# EAGLE board module_pcb_v78 (EAGLE 9.7.0)
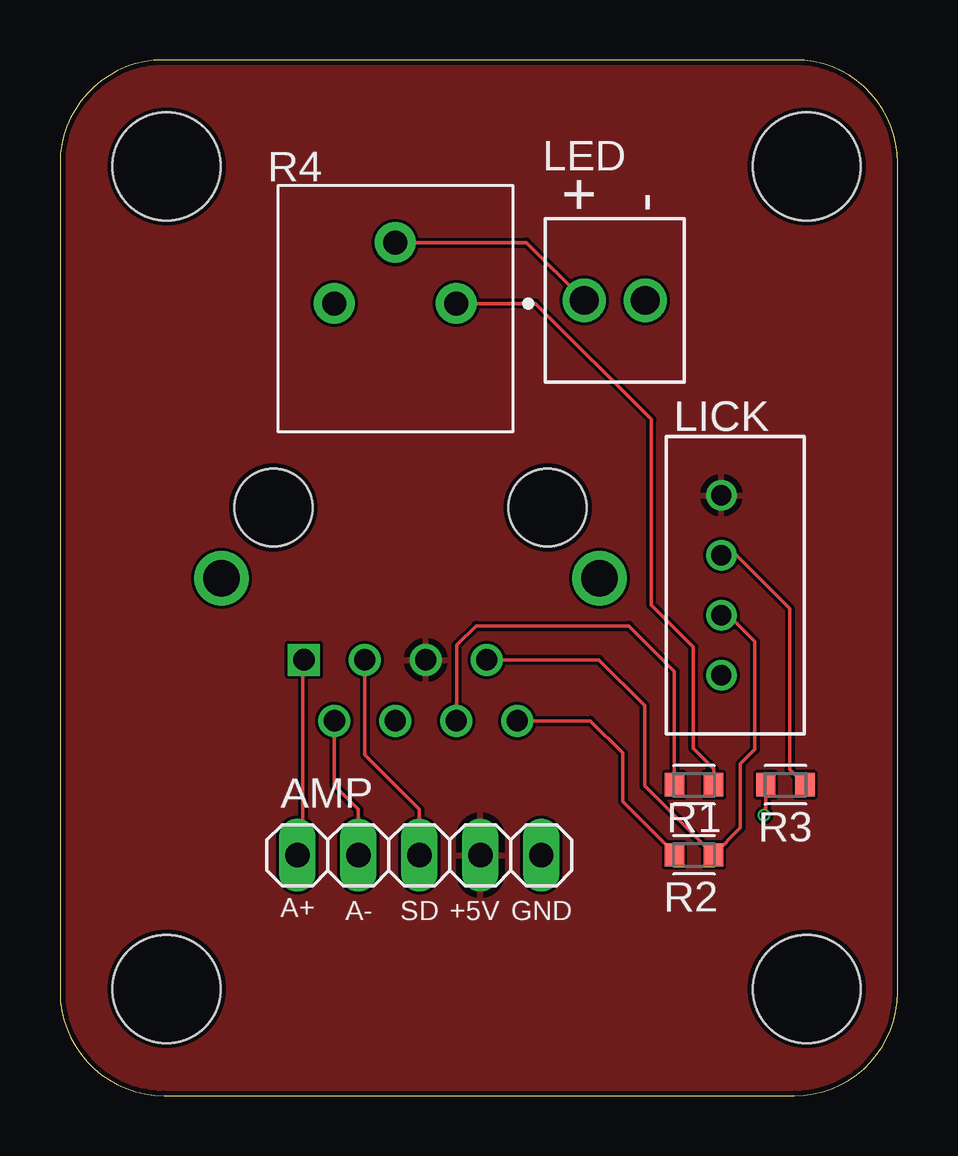
[diagram p0: board, top side]
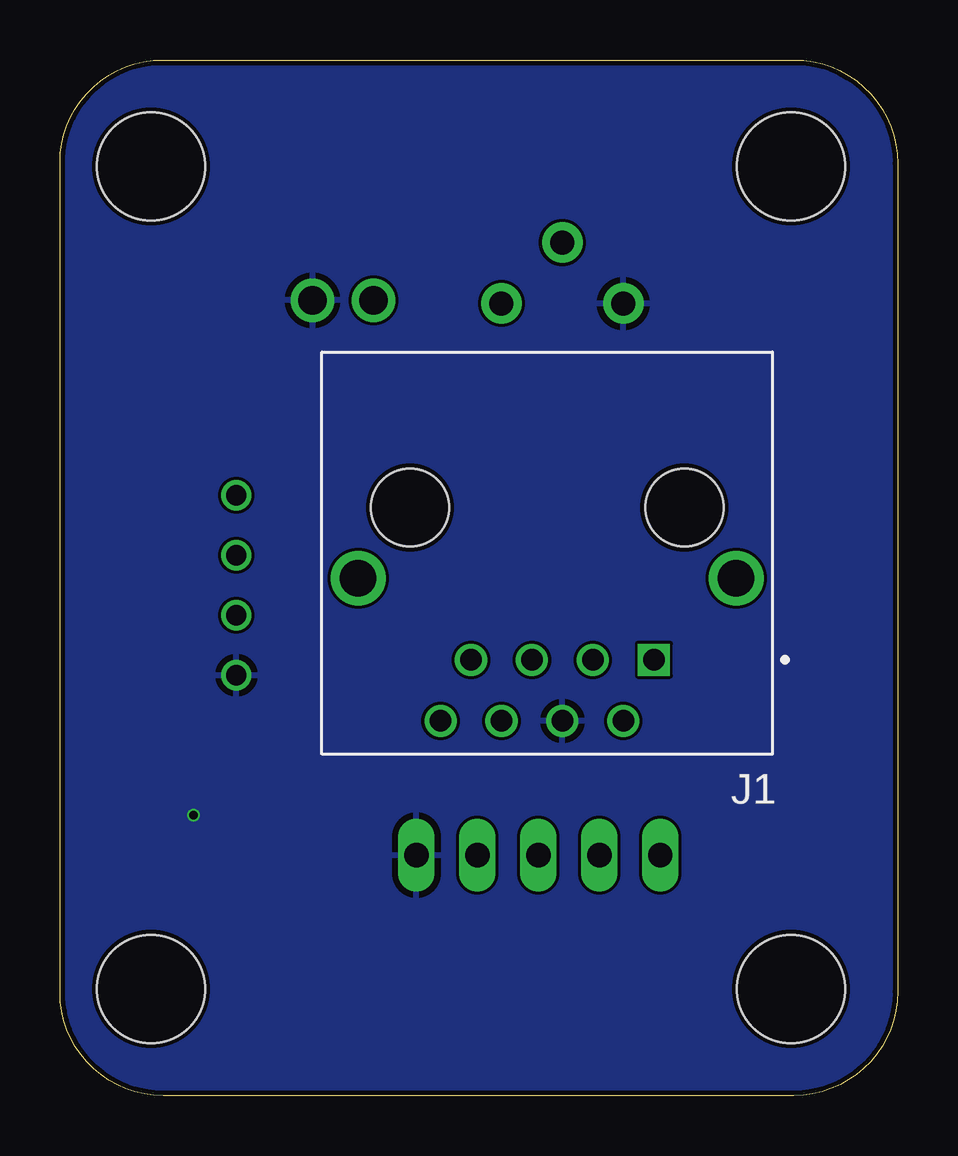
[diagram p1: board, bottom side, seen from below]

Size 34.91 x 43.17 mm. Coordinates in mm from the lower left corner, seen from the top.
Outline: 30.62,43.17 4.32,43.17 arc90 0,38.85 0,4.34 arc90 4.34,0 30.6,0 arc90 34.91,4.3 34.91,38.89 arc90 30.62,43.17
Copper layers (1*16): Top 0.035559375mm / dielectric 1.6mm / Bottom 0.035559375mm
Design rules "jlcpcb2layer": minimum track width 5mil, minimum drill 12mil, track to track 5mil, track to pad 5mil, pad to pad 5mil, via to via 5mil, smd to smd 5mil, copper to edge 8mil, drill to drill 6mil, minimum pad ring 5mil, minimum via ring 3mil, stop-mask expansion 2.5mil, vias tented up to drill 0mil, thermal gap 10mil
Holes 4.5 mm at 4.45,38.73 4.45,4.45 31.11,4.45 31.11,38.73

## Footprints (pad centres in the part's own frame; a part is rotated, then mirrored left to right if it is on the bottom)
1X05 = drill 1.016 long: 1 -5.08,0; 2 -2.54,0; 3 0,0; 4 2.54,0; 5 5.08,0
TE_5557969-1 = drill 0.89 square: 1 -4.445,6.35 | drill 0.89: 2 -3.175,8.89; 3 -1.905,6.35; 4 -0.635,8.89; 5 0.635,6.35; 6 1.905,8.89; 7 3.175,6.35; 8 4.445,8.89 | drill 1.52: S1 -7.875,2.95; S2 7.875,2.95 | hole 3.25: -5.715,0; 5.715,0
TERMBLK_254-2N = drill 1.2: 1 0,0; 2 2.54,0
B4B-XH-A = drill 0.84: 1 0,0; 2 2.5,0; 3 5,0; 4 7.5,0
RESC1608X60 = smd 0.799 x 0.974: 1 -0.815,0; 2 0.815,0
PV36P = drill 1 pad 1.7: 1 0,0; 2 2.54,-2.54; 3 5.08,0

## Placement (x,y rotation side)
AMP  PINHD-1X5  [1X05]  14.97,10.02 180 top
J1  5557969-1  [TE_5557969-1]  14.61,24.51 180 bottom
LED  2828XX-2282834-2  [TERMBLK_254-2N]  24.38,33.15 180 top
LICK  B4B-XH-A  [B4B-XH-A]  27.56,25.02 270 top
R1  220Ω  [RESC1608X60]  26.42,12.95 0 top
R2  22kΩ  [RESC1608X60]  26.42,10.03 0 top
R3  68Ω  [RESC1608X60]  30.23,12.95 0 top
R4  1kΩ  [PV36P]  16.51,33.02 180 top

## Library data of the parts
AMP = Connector; CATEGORY: Headers; DESCRIPTION: Header, Straight, 5 Position; MANUFACTURER: Generic; MPN: Generic; OPERATING_TEMPERATURE: Generic; PART_STATUS: Active; PITCH: 0.100" (2.54mm); ROHS_COMPLIANCE: Generic; SERIES: Generic; SUB-CATEGORY: Headers, Male Pins; TYPE: Board to Board or Cable, Unshrouded, Through Hole, Straight
J1 = 5557969-1; MANUFACTURER: TE Connectivity; PARTREV: E; STANDARD: Manufacturer Recommendation
LED = Connector; CATEGORY: Fixed Terminal Blocks; DESCRIPTION: Fixed Terminal Blocks 2P SIDE ENTRY 2.54mm; MANUFACTURER: TE Connectivity AMP Connectors; MPN: 282834-2; OPERATING_TEMPERATURE: -40°C ~ 105°C; PART_STATUS: Active; PITCH: 0.100" (2.54mm); ROHS_COMPLIANCE: RoHS Compliant; SERIES: Buchanan; SUBCATEGORY: Terminal Blocks; TYPE: Through Hole; Screw - Rising Cage Clamp; Side wire entry, Horizontal with Board
LICK = Connector; CATEGORY: Header; DSECRIPTION: Connector Header Through Hole 4 position 0.098" (2.50mm); MANUFACTURER: JST Sales America Inc.; MPN: B4B-XH-A(LF)(SN); OPERATING_TEMPERATURE: -25 C to 85 C; PART_STATUS: ACTIVE; PITCH: 0.098" (2.50mm); ROHS_COMPLIANCE: ROHS3 Compliant; SERIES: XH; SUB_CATEGORY: Rectangular Connectors; TYPE: Header, Male Pin, Board to Cable/Wire, Through Hole
R1-R3 = Resistor; CATEGORY: Resistor; SUB-CATEGORY: Fixed
R4 = Resistor; CATEGORY: Resistor; DESCRIPTION: Lead Sealed Type Multiturn PV36 Series; MANUFACTURER: BOURNS; MPN: PV36P; OPERATING_TEMPERATURE: -55 to +125 °C; PART_STATUS: Active; ROHS_COMPLIANCE: RoHS Compliant; SERIES: PV36; SUB-CATEGORY: Trimpot; TYPE: Lead Sealed

## Nets
+3.3V: J1.8 R2.1
+5V: AMP.2 J1.5 LICK.1
A+: AMP.5 J1.1
A-: AMP.4 J1.2
GND: AMP.1 J1.4 LED.1 LICK.4 R3.1 R4.3
LED_ON: J1.6 R1.1
LICK: J1.7 LICK.3 R2.2
N$1: LICK.2 R3.2
N$2: LED.2 R4.2
N$4: R1.2 R4.1
SD: AMP.3 J1.3

## Tracks (layer width: path | path; a pad name or v marks a point on that pad's centre or on a via)
+3.3V
  Top 0.152: R2.1 25.6,10.12 23.45,12.27 23.45,14.28 22.1,15.62 J1.8
+5V
  pour Top: 4.34,0.08 30.6,0.08 31.15,0.11 31.7,0.22 32.22,0.4 32.72,0.64 33.18,0.95 33.59,1.31 33.96,1.73 34.26,2.19 34.51,2.68 34.68,3.21 34.79,3.75 34.83,4.3 34.83,38.88 34.79,39.44 34.69,39.98 34.51,40.5 34.27,40.99 33.96,41.45 33.6,41.86 33.18,42.22 32.73,42.53 32.23,42.77 31.71,42.95 31.17,43.06 30.62,43.09 4.32,43.09 3.76,43.05 3.22,42.95 2.69,42.77 2.2,42.52 1.73,42.22 1.32,41.85 0.95,41.43 0.64,40.97 0.4,40.47 0.22,39.95 0.11,39.41 0.08,38.85 0.08,4.34 0.11,3.78 0.22,3.23 0.4,2.71 0.65,2.21 0.96,1.74 1.32,1.32 1.74,0.96 2.21,0.65 2.71,0.4 3.23,0.22 3.78,0.11
A+
  Top 0.152: J1.1 10.12,18.12 10.12,10.25 AMP.5
A-
  Top 0.152: J1.2 11.43,12.93 12.43,11.93 AMP.4
GND  (via drill 0.35)
  Top 0.152: R3.1 29.41,11.76 v29.34,11.68
  pour Bottom: 4.34,0.08 30.6,0.08 31.15,0.11 31.7,0.22 32.22,0.4 32.72,0.64 33.18,0.95 33.59,1.31 33.96,1.73 34.26,2.19 34.51,2.68 34.68,3.21 34.79,3.75 34.83,4.3 34.83,38.88 34.79,39.44 34.69,39.98 34.51,40.5 34.27,40.99 33.96,41.45 33.6,41.86 33.18,42.22 32.73,42.53 32.23,42.77 31.71,42.95 31.17,43.06 30.62,43.09 4.32,43.09 3.76,43.05 3.22,42.95 2.69,42.77 2.2,42.52 1.73,42.22 1.32,41.85 0.95,41.43 0.64,40.97 0.4,40.47 0.22,39.95 0.11,39.41 0.08,38.85 0.08,4.34 0.11,3.78 0.22,3.23 0.4,2.71 0.65,2.21 0.96,1.74 1.32,1.32 1.74,0.96 2.21,0.65 2.71,0.4 3.23,0.22 3.78,0.11
LED_ON
  Top 0.152: J1.6 16.53,15.64 16.53,18.78 17.34,19.58 23.7,19.58 25.6,17.68 R1.1
LICK
  Top 0.152: LICK.3 27.86,20.02 28.96,18.92 28.96,14.43 28.35,13.82 28.35,11.15 R2.2 24.36,12.9 24.36,16.25 22.46,18.16 J1.7
N$1
  Top 0.152: LICK.2 28.19,22.52 30.41,20.31 30.41,13.59 R3.2
N$2
  Top 0.152: R4.2 19.43,35.56 LED.2
N$4
  Top 0.152: R4.1 19.81,33.02 24.64,28.19 24.64,20.44 26.39,18.69 26.39,14.47 27.23,13.62 R1.2
SD
  Top 0.152: J1.3 12.7,14.2 14.97,11.93 AMP.3

## Text on the board
tNames: + | - | A+ | A- | SD | +5V | GND